# Altium PCB Lilypad_PCB1.PcbDoc
Units mil, origin at the board's own origin, x right, y up, seen from the top; angles counter-clockwise.
Board outline 3900 x 3900 mil, 2 copper layers (Top Layer, Bottom Layer), stack 12.8 mil thick; 38 components, 30 nets, 107 pads, 17 vias.
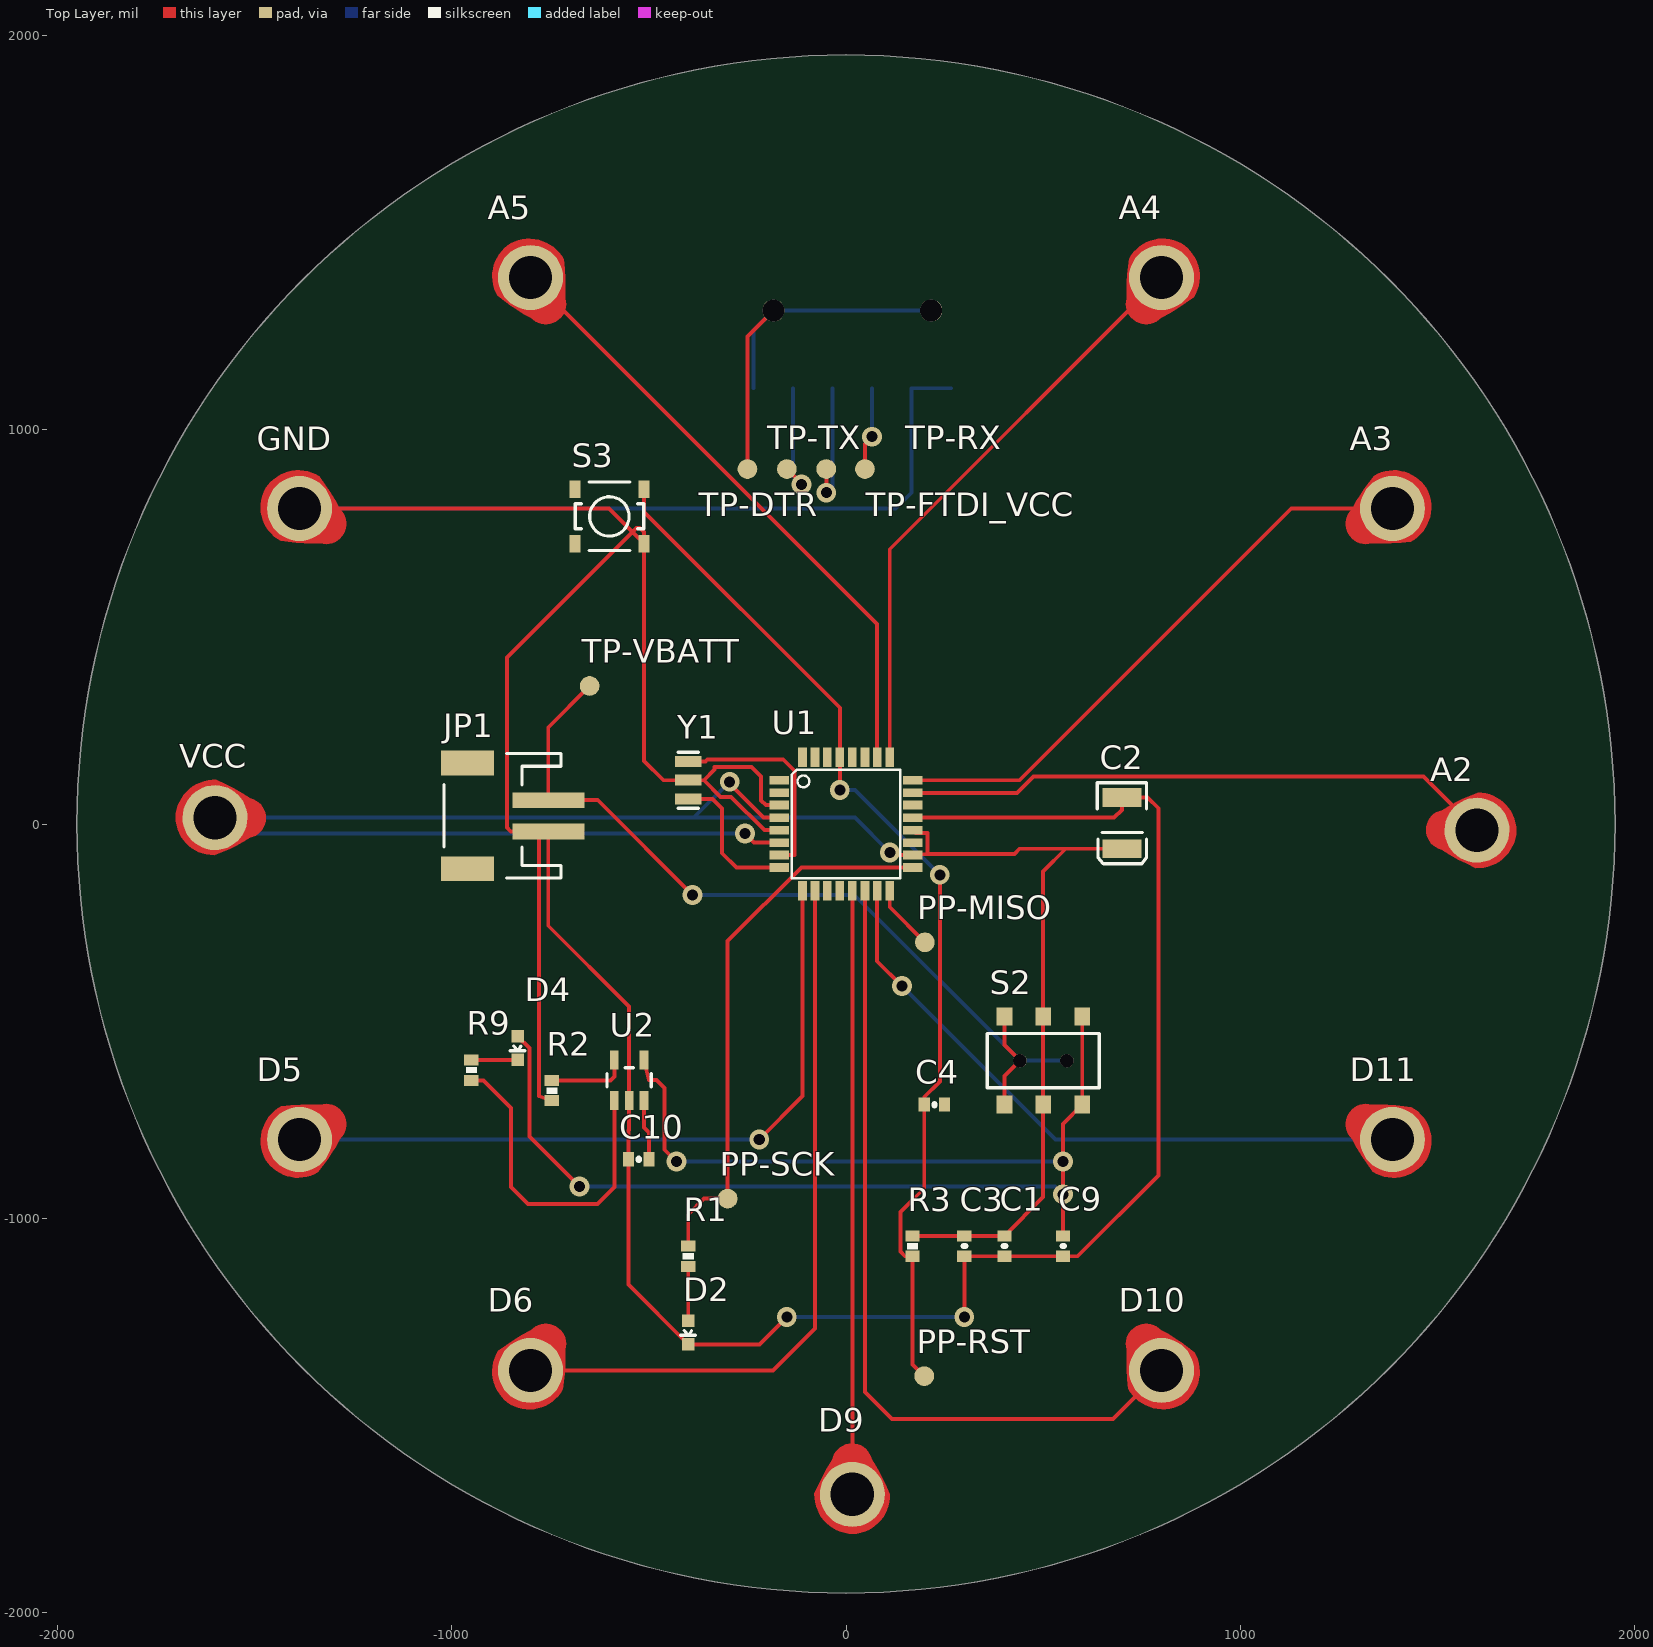
[diagram p0: Top Layer view]
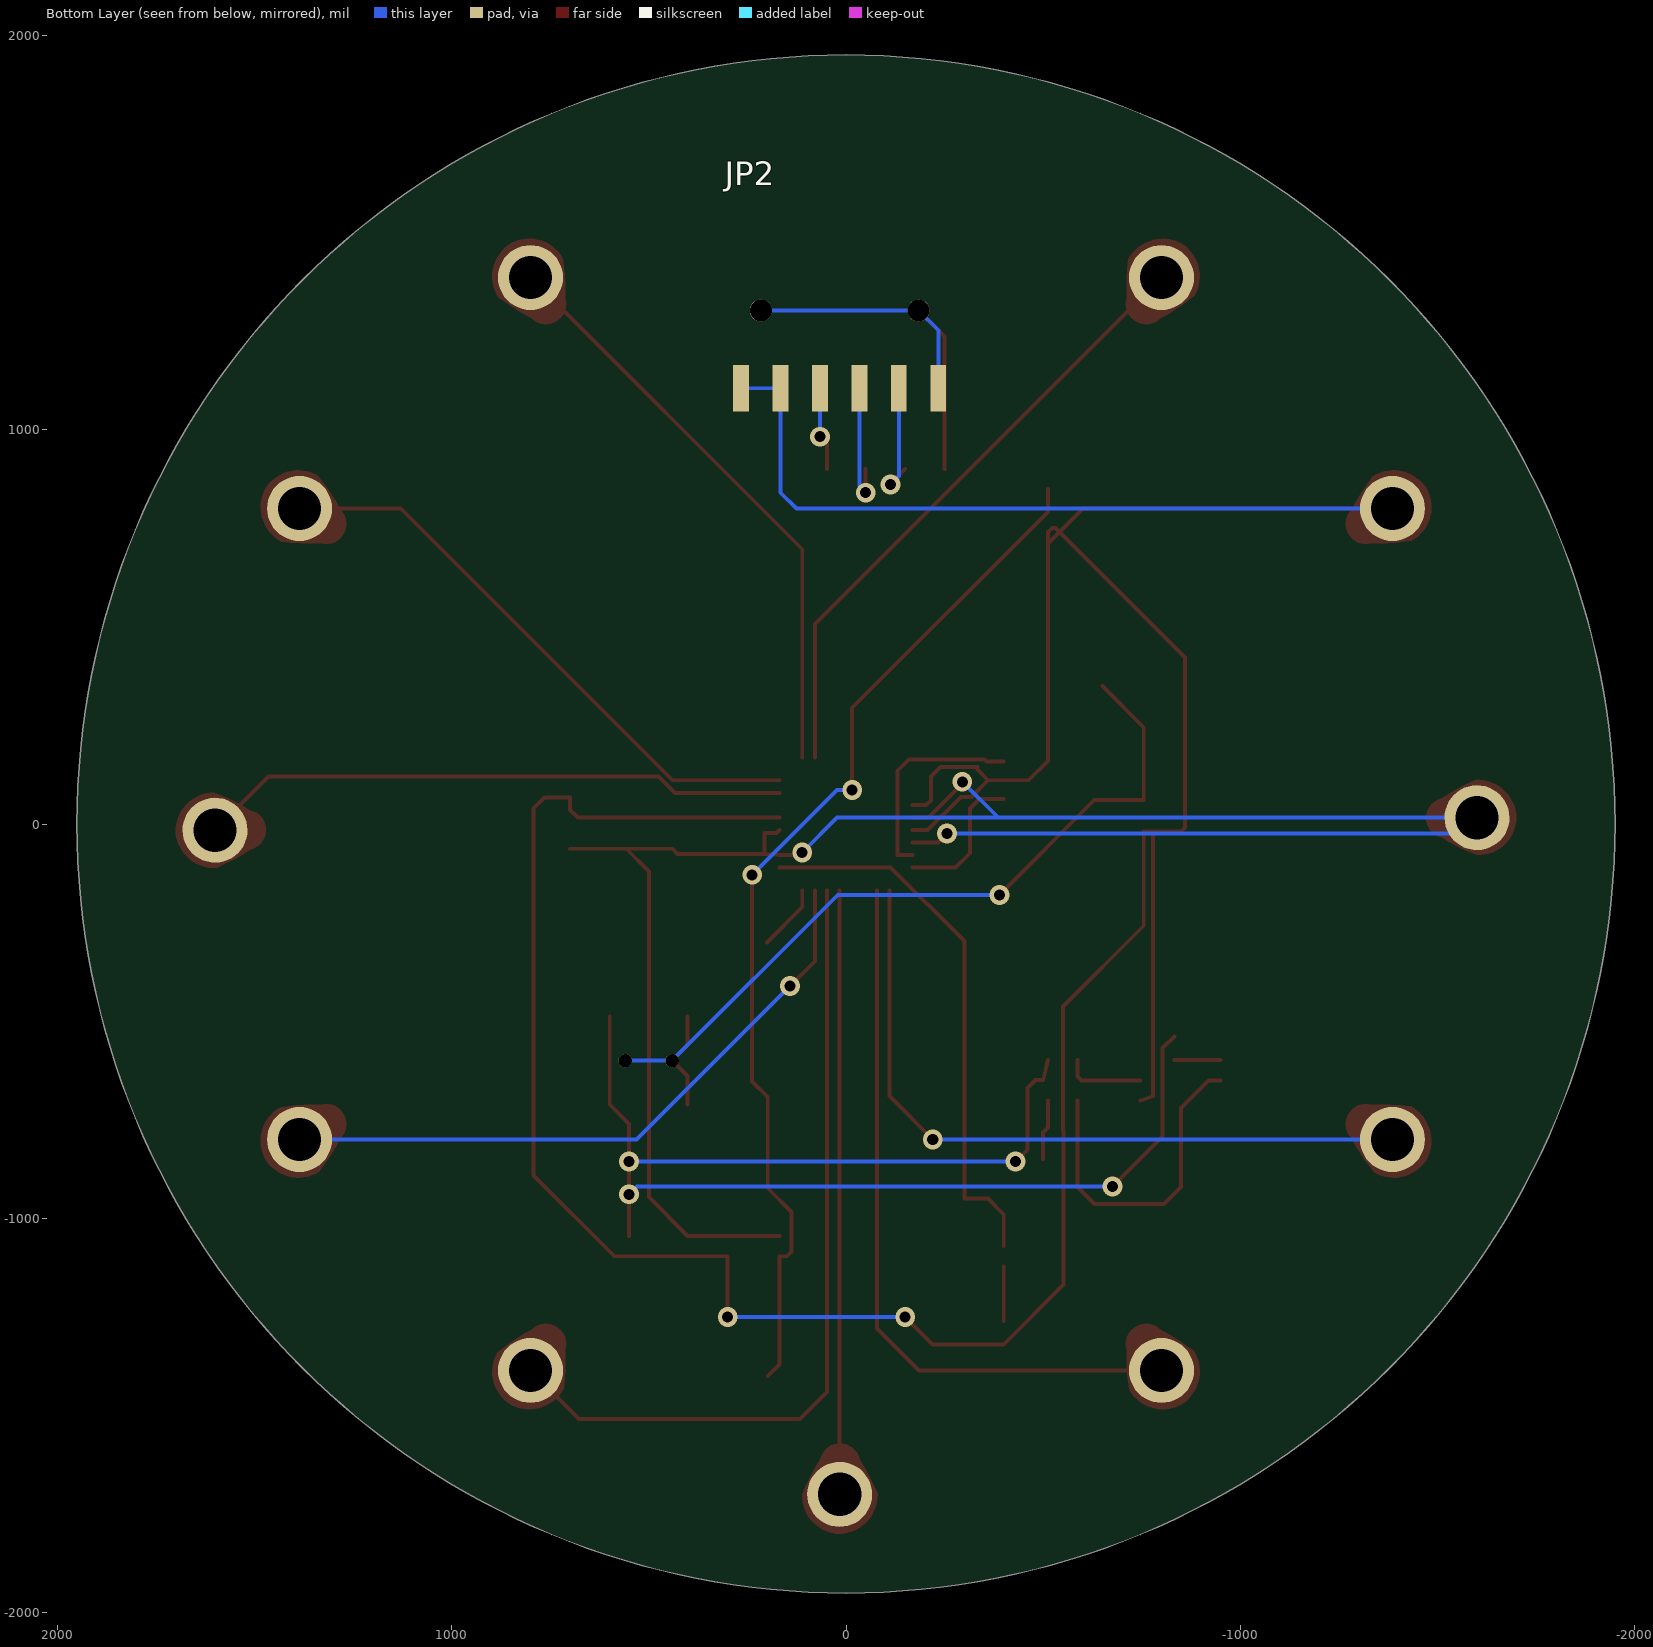
[diagram p1: Bottom Layer view, seen from below]

## Layer stack, top to bottom
Top Solder: solder mask 0.4, Solder Resist, Dk 3.5
Top Layer: signal copper 1.4
Dielectric 1: core 10, FR-4, Dk 4.2
Bottom Layer: signal copper 1.4
Bottom Solder: solder mask 0.4, Solder Resist, Dk 3.5

## Board outline
-1950,0 ccw(c0,0) 0,-1950 ccw(c0,0) 1950,0 ccw(c0,0) 0,1950 ccw(c0,0)

## Design rules (kind name [scope] priority, off if disabled: settings)
Clearance [All] p1: gap=8 ignorepadtopadclearanceinfootprint=FALSE
PolygonConnect [All] p1: connectstyle=Relief reliefconductorwidth=10 reliefentries=4 polygonreliefangle="90 Angle" airgapwidth=10
RoutingVias [All] p1: holewidth=28 width=50 viastyle="Through Hole" minholewidth=28 minwidth=50 maxholewidth=28 maxwidth=50
SolderMaskExpansion [All] p1: expansion=4
Width [All] p1: maxlimit=10 minlimit=10 preferedwidth=10
30 further rules are at their usual default settings.

## Components (designator, comment, footprint, x,y, rotation, side; value= is the part's Value field where it differs from the comment)
A2 "CONN" PETAL-LONG-2 1599.92,-15.75 r89.44 top
A3 "CONN" PETAL-LONG-2 1385.64,800 r120 top (schematic designator TP7)
A4 "CONN" PETAL-LONG-2 800,1385.64 r150 top
A5 "CONN" PETAL-LONG-2 -800,1385.64 r210 top
C1 "CAP0402-CAP" 0402-CAP 401.57,-1070 r270 top
C2 "CAP_POL3528" EIA3528 700,2.19 r270 top
C3 "CAP0402-CAP" 0402-CAP 300,-1070 r270 top
C4 "CAP0402-CAP" 0402-CAP 224.41,-711.22 r180 top
C9 "CAP0402-CAP" 0402-CAP 550,-1070 r270 top
C10 "CAP0402-CAP" 0402-CAP -525.59,-850 r180 top
D2 "LED0603" LED-0603 -400,-1289.48 r180 top
D4 "LED0603" LED-0603 -832.49,-568 r180 top
D5 "CONN" PETAL-LONG-2 -1385.64,-800 r300 top
D6 "CONN" PETAL-LONG-2 -800,-1385.64 r330 top
D9 "CONN" PETAL-LONG-2 16,-1699.92 r0.54 top
D10 "CONN" PETAL-LONG-2 800,-1385.64 r30 top
D11 "CONN" PETAL-LONG-2 1385.64,-800 r60 top
GND "CONN" PETAL-LONG-2 -1385.64,800 r240 top
JP1 "M02-JST-2MM-SMT" JST-2-SMD -900,20.5 r90 top
JP2 "ARDUINO_SERIAL_PROGRAMSMD" 1X06-SMD 16,1301.94 r0 bottom
PP-MISO "TEST-POINT3X5" PAD.03X.05 200,-300 r90 top
PP-RST "TEST-POINT3X5" PAD.03X.05 198.41,-1400 r90 top
PP-SCK "TEST-POINT3X5" PAD.03X.05 -300,-950 r90 top
R1 "RESISTOR0402-RES" 0402-RES -400,-1096 r270 top
R2 "RESISTOR0402-RES" 0402-RES -746.04,-676 r90 top
R3 "RESISTOR0402-RES" 0402-RES 169,-1070.41 r90 top
R9 "RESISTOR0402-RES" 0402-RES -950,-624 r270 top
S2 "AYZ0202" AYZ0202 500,-600 r0 top
S3 "SWITCH-MOMENTARY-2SMD-2" TACTILE_SWITCH_SMD-2 -600,779.95 r0 top
TP-DTR "TEST-POINT3X5" PAD.03X.05 -250,900 r90 top
TP-FTDI_VCC "TEST-POINT3X5" PAD.03X.05 48,900 r90 top
TP-RX "TEST-POINT3X5" PAD.03X.05 -50,900 r90 top
TP-TX "TEST-POINT3X5" PAD.03X.05 -150,900 r90 top
TP-VBATT "TEST-POINT3X5" PAD.03X.05 -650,350 r90 top
U1 "ATMEGA328" TQFP32-08 0,0 r0 top
U2 "MCP73831" SOT23-5 -550,-650 r0 top
VCC "CONN" PETAL-LONG-2 -1599.92,16 r269.43 top
Y1 "RESONATORSMD" RESONATOR-SMD -400,111 r270 top

## Footprints (in the part's own frame and the unit in brackets; to place one, negate y for a bottom-side part, rotate by r counter-clockwise, add the part's x,y. Pads: shape width x height; smd on the part's side, far side on the other; paste and mask are expansions set on the pad)
1X06-SMD [mil]
  rect 40x119 smd: 1(-250,197) 2(-150,197) 3(-50,197) 4(50,197) 5(150,197) 6(250,197)
  round 56 hole 56: 1(-200,0) 1(200,0)
0402-CAP [mil]
  rect 28x36 smd: 1(-25.59,0) 2(26,0)
  silkscreen extent 0,-1 0,2
0402-RES [mil]
  rect 28x36 smd: 1(-25.59,0) 2(26,0)
  silkscreen extent -8,-14 8,14
AYZ0202 [mil]
  rect 40x46 smd: 1(-98.43,112) 2(0,112) 3(99,112) 4(-98.43,-111.22) 5(0,-111.22) 6(99,-111.22)
  round 34 hole 34: 1(-59.06,0) 1(60,0)
  silkscreen extent -142,-69 142,69
EIA3528 [mil]
  rect 48x99 smd: A(65,0) C(-64.96,0)
  silkscreen extent -102,-63 103,62
JST-2-SMD [mil]
  rect 40x182 smd: 1(-39.37,-145.67) 2(40,-145.67)
  rect 63x134 smd: NC1(-133.86,60) NC2(134,60)
  silkscreen extent -157,-177 158,119
LED-0603 [mil]
  rect 32x32 smd: A(0,-29.53) C(0,30)
  silkscreen extent -18,-6 19,7
PAD.03X.05 [mil]
  rrect100% 50x50 smd: P$1(0,0)
PETAL-LONG-2 [mil]
  round 165 hole 110: 1(0,0)
  Top Layer region: -50,89 -74.74,46.44 -95.91,2 -95.91,2 -89.54,-36.1 -69.08,-68.87 -37.64,-91.31 0,-100 0,-100 48.27,-85.94 83.04,-49.62 95,-0.79 95,-0.79 74.99,45.35 50,89 50,89 40.14,109.62 22.29,123.91 0,129.01 -22.29,123.91 -40.14,109.62 -50,89
RESONATOR-SMD [mil]
  rect 28x67 smd: 1(-47.24,0) 2(0,0) 3(48,0)
  silkscreen extent -71,-26 71,26
SOT23-5 [mil]
  rect 22x48 smd: 1(-37.4,-51.18) 2(0,-51.18) 3(38,-51.18) 4(38,52) 5(-37.4,52)
  silkscreen extent -56,-17 56,32
TACTILE_SWITCH_SMD-2 [mil]
  rect 28x44 smd: 1(88,69) 2(88,-68.9) 3(-87.6,-68.9) 4(-87.6,69)
  silkscreen extent -87,-87 87,87
TQFP32-08 [mil]
  rect 50x22 smd: 1(-169,111) 2(-169,79) 3(-169,48) 4(-169,16) 5(-169,-15.75) 6(-169,-47.24) 7(-169,-78.74) 8(-169,-110.24) 17(169,-110.24) 18(169,-78.74) 19(169,-47.24) 20(169,-15.75) 21(169,16) 22(169,48) 23(169,79) 24(169,111)
  rect 22x50 smd: 9(-110.24,-169) 10(-78.74,-169) 11(-47.24,-169) 12(-15.75,-169) 13(16,-169) 14(48,-169) 15(79,-169) 16(111,-169) 25(111,169) 26(79,169) 27(48,169) 28(16,169) 29(-15.75,169) 30(-47.24,169) 31(-78.74,169) 32(-110.24,169)
  silkscreen extent -138,-138 138,138

## Via types
v1: diameter 50, hole 28, Top Layer to Bottom Layer, 17 vias

## Nets (pads, with @x,y where several pads share a name; then routed paths per layer and width w, separated by ;. In a path a pad name is that pad's centre, name@x,y a point inside that pad or via, vN(x,y) a via of type N, cw(c..) or ccw(c..) an arc to the next point about the centre after c; other vN are vias at no path point)
A2: A2.1 U1.23 | length 1504.1
  Top Layer w10: U1.23 434,79 475,120 1464.17,120 A2.1
A3: A3.1 U1.24 | length 1502
  Top Layer w10: U1.24 440,111 1129,800 A3.1
A4: A4.1 U1.25 | length 1502
  Top Layer w10: U1.25 111,696.64 A4.1
A5: A5.1 U1.26 | length 1580.7
  Top Layer w10: A5.1 79,506.64 U1.26
D5: D5.1 U1.9 | length 1842.1
  Top Layer w10: v1(-220,-800) -110.24,-690.24 U1.9
  Bottom Layer w10: D5.1 v1(-220,-800)
D6: D6.1 U1.10 | length 1875.9
  Top Layer w10: D6.1 -184.64,-1385.64 -78.74,-1279.74 U1.10
D9: D9.1 U1.13 | length 1530.9
  Top Layer w10: D9.1 U1.13
D10: D10.1 U1.14 | length 2102.7
  Top Layer w10: U1.14 48,-1440 117,-1509 676.64,-1509 D10.1
D11: D11.1 U1.15 | length 1672.9
  Top Layer w10: U1.15 79,-348 v1(142,-411)
  Bottom Layer w10: v1(142,-411) 531,-800 D11.1
D12: PP-MISO.P$1 U1.16 | length 167.9
  Top Layer w10: U1.16 111,-211 PP-MISO.P$1
D13: PP-SCK.P$1 R1.1 U1.17 | length 1396.3
  Top Layer w10: R1.1 -400,-990 -360,-950 PP-SCK.P$1 -300,-297 -113.24,-110.24 U1.17
DTR: C4.1
FTDI_VCC: C9.1 D4.A S2.3 S2.6 U2.4 | length 3536.4
  Top Layer w10: D4.A -803,-567.96 -803,-792 v1(-676,-919) ; U2.4 -500,-649 -480,-649 -460,-669 -460,-826 v1(-430,-856) ; C9.1 v1(550,-939) v1(550,-856) 550,-760.22 S2.6 S2.3
  Bottom Layer w10: v1(-676,-919) 530,-919 v1(550,-939) ; v1(-430,-856) v1(550,-856)
GND: C1.2 C2.C C3.2 C9.2 C10.2 D2.C GND.1 JP1.1 JP2.5 JP2.6 R2.1 S3.2 U1.3 U1.5 U1.21 U2.2 Y1.2 | length 10371.9
  Top Layer w10: GND.1 -600.95,800 -541.47,740.53 ; JP1.1 JP1.1@-755,-18.87 ; R2.1 -778,-690 JP1.1@-778,-18.87 ; U1.5 -207,-15.75 -291.75,69 -318,69 -360,111 ; U1.3 -203,48 -215,60 -215,120 -240,145 -333,145 -333,138 -360,111 ; v1(-150,-1250) -219.48,-1319.48 D2.C -551.59,-1167.89 C10.2 -551.59,-777 -550,-775.41 U2.2 -550,-463 -755,-258 JP1.1@-755,-18.87 ; U1.21 680,16 700,36 C2.C 764.85,67.15 792,40 792,-891 587,-1096 C9.2 C1.2 C3.2 v1(300,-1250) ; JP1.1@-778,-18.87 JP1.1@-755,-18.87 ; JP1.1@-778,-18.87 -850,-18.87 -860,-8.87 -860,422 -541.47,740.53 ; -541.47,740.53 S3.2 ; -541.47,740.53 -531,751 -523,751 -512,740 S3.2 ; S3.2 -512,160 -463,111 Y1.2 -360,111
  Bottom Layer w10: GND.1 126,800 166,840 JP2.5 JP2.6 ; v1(-150,-1250) v1(300,-1250)
NetC10_1: C10.1 U2.3 | length 153.8
  Top Layer w10: U2.3 -512,-770 -500,-782 C10.1
NetD2_A: D2.A R1.2 | length 137.9
  Top Layer w10: D2.A R1.2
NetD4_C: D4.C R9.1 | length 117.7
  Top Layer w10: R9.1 -892,-598.41 -891.59,-598 D4.C
NetJP2_1: JP2.1 TP-DTR.P$1 | length 1047
  Top Layer w10: TP-DTR.P$1 -250,1235.94 JP2.1@-184,1301.94
  Bottom Layer w10: JP2.1@-234,1104.94 -234,1251.94 -184,1301.94 JP2.1@216,1301.94
NetJP2_2: JP2.2 TP-TX.P$1 | length 307
  Top Layer w10: TP-TX.P$1 -113,863 v1(-113,861)
  Bottom Layer w10: JP2.2 -134,882 v1(-113,861)
NetJP2_3: JP2.3 TP-RX.P$1 | length 331.6
  Top Layer w10: v1(-50,840) TP-RX.P$1
  Bottom Layer w10: v1(-50,840) -34,856 JP2.3
NetJP2_4: JP2.4 TP-FTDI_VCC.P$1 | length 212.4
  Top Layer w10: TP-FTDI_VCC.P$1 48,964 v1(66,982)
  Bottom Layer w10: v1(66,982) JP2.4
NetR2_2: R2.2 U2.5 | length 204.8
  Top Layer w10: R2.2 -597.4,-650 -587.4,-640 U2.5
NetR9_2: R9.2 U2.1 | length 846
  Top Layer w10: R9.2 -919,-650 -849,-720 -849,-920 -806,-963 -630.4,-963 -587.4,-920 U2.1
NetU1_7: U1.7 Y1.1 | length 534.4
  Top Layer w10: Y1.1 -356.61,158.24 -351.75,163.11 -159.11,163.11 -131,135 -131,-78.74 U1.7
NetU1_8: U1.8 Y1.3 | length 369.1
  Top Layer w10: Y1.3 -338,63 -314,39 -314,-74.24 -278,-110.24 U1.8
RST: C4.2 PP-RST.P$1 R3.1 S3.1 U1.29 | length 2659.9
  Top Layer w10: S3.1 -512,791 -15.75,294.75 U1.29 v1(-15.75,86) ; PP-RST.P$1 169,-1370.59 R3.1 150,-1096 138,-1084 138,-984 198.41,-923.59 C4.2 198.41,-692.59 238,-653 v1(238,-129)
  Bottom Layer w10: v1(-15.75,86) 23,86 v1(238,-129)
RXI: U1.30
TXO: U1.31
VBATT: JP1.2 S2.1 S2.4 TP-VBATT.P$1 | length 2177.4
  Top Layer w10: TP-VBATT.P$1 -755,245 -755,60.5 JP1.2 -629.5,60.5 v1(-389,-180) ; S2.4 401.57,-639.37 440.94,-600 401.57,-560.63 S2.1@401.57,-488
  Bottom Layer w10: v1(-389,-180) 20.94,-180 440.94,-600 S2.1@560,-600
VCC: C1.1 C2.A C3.1 R3.2 S2.2 S2.5 U1.4 U1.6 U1.18 U1.20 VCC.1 | length 5469.5
  Top Layer w10: v1(-295,107) -295,102.29 -208.71,16 U1.4 ; v1(-256,-24) -232.76,-47.24 U1.6 ; v1(111,-72) 117.74,-78.74 U1.18 169.74,-78.74 207,-76 ; R3.2 C3.1 C1.1 500,-945.98 S2.5 S2.2 500,-120 557.19,-62.81 ; U1.20 176.5,-23.24 207,-23.24 207,-76 ; C2.A 557.19,-62.81 ; 207,-76 427,-76 440.19,-62.81 557.19,-62.81
  Bottom Layer w10: v1(-295,107) -386,16 ; v1(-256,-24) -1559.92,-24 VCC.1 -386,16 ; v1(111,-72) 23,16 -386,16
pads on no net: JP1.NC1 JP1.NC2 S3.3 S3.4 U1.1 U1.2 U1.11 U1.12 U1.19 U1.22 U1.27 U1.28 U1.32

## Silkscreen, mask and mechanical layers (free items; w line width, h text height)
Mechanical 1:
  circle w10: c0,0 r1950

## Text inside footprints (layer, text, board x,y; h text height)
JP1: Mechanical 16 "-" at -725,-94.5 h77.5 r90; Mechanical 16 "+" at -725,105.5 h77.5 r90